# EAGLE board io3 (EAGLE 7.2.0)
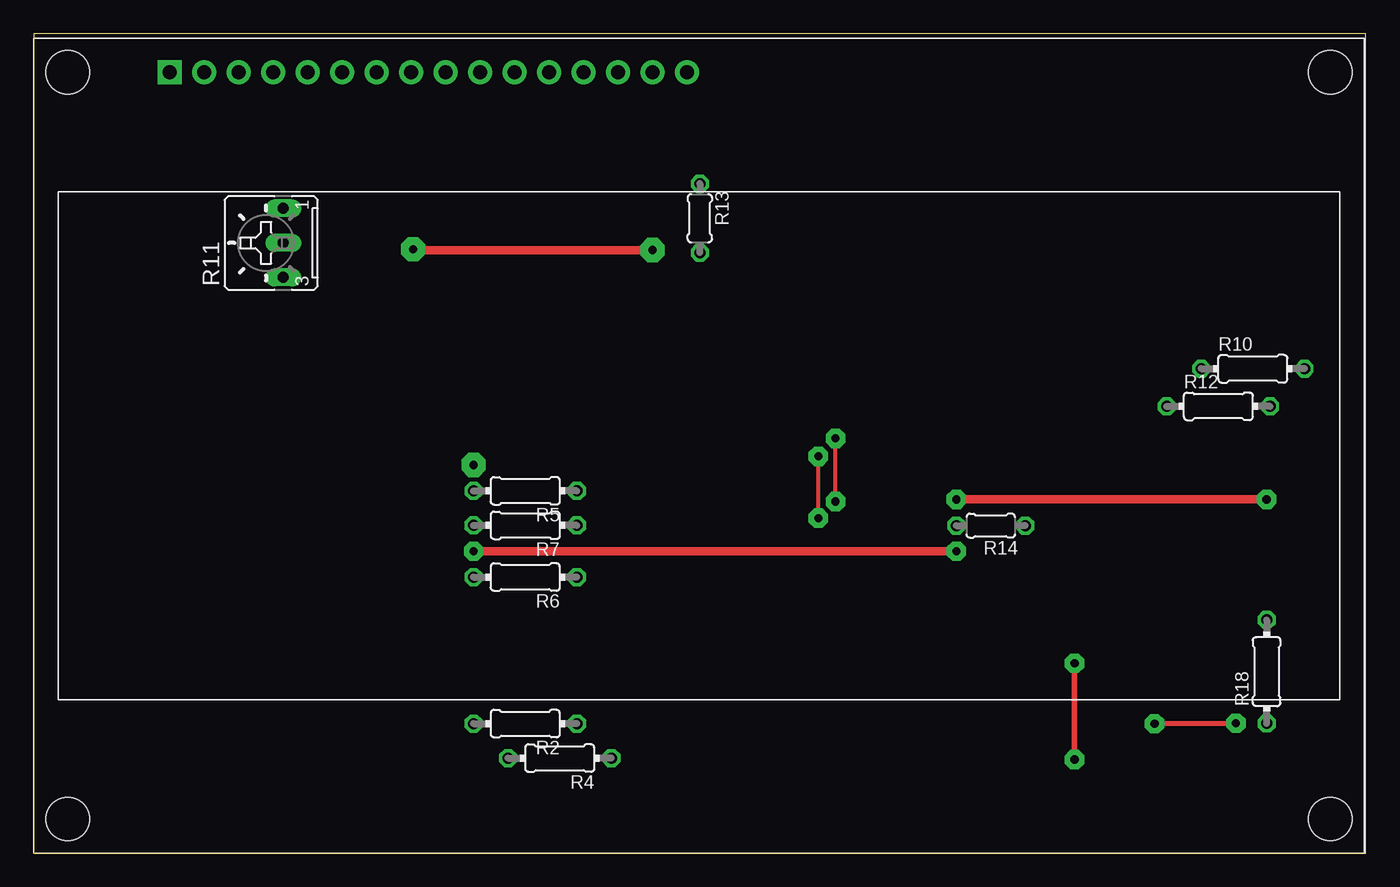
[diagram p0: board, top side]
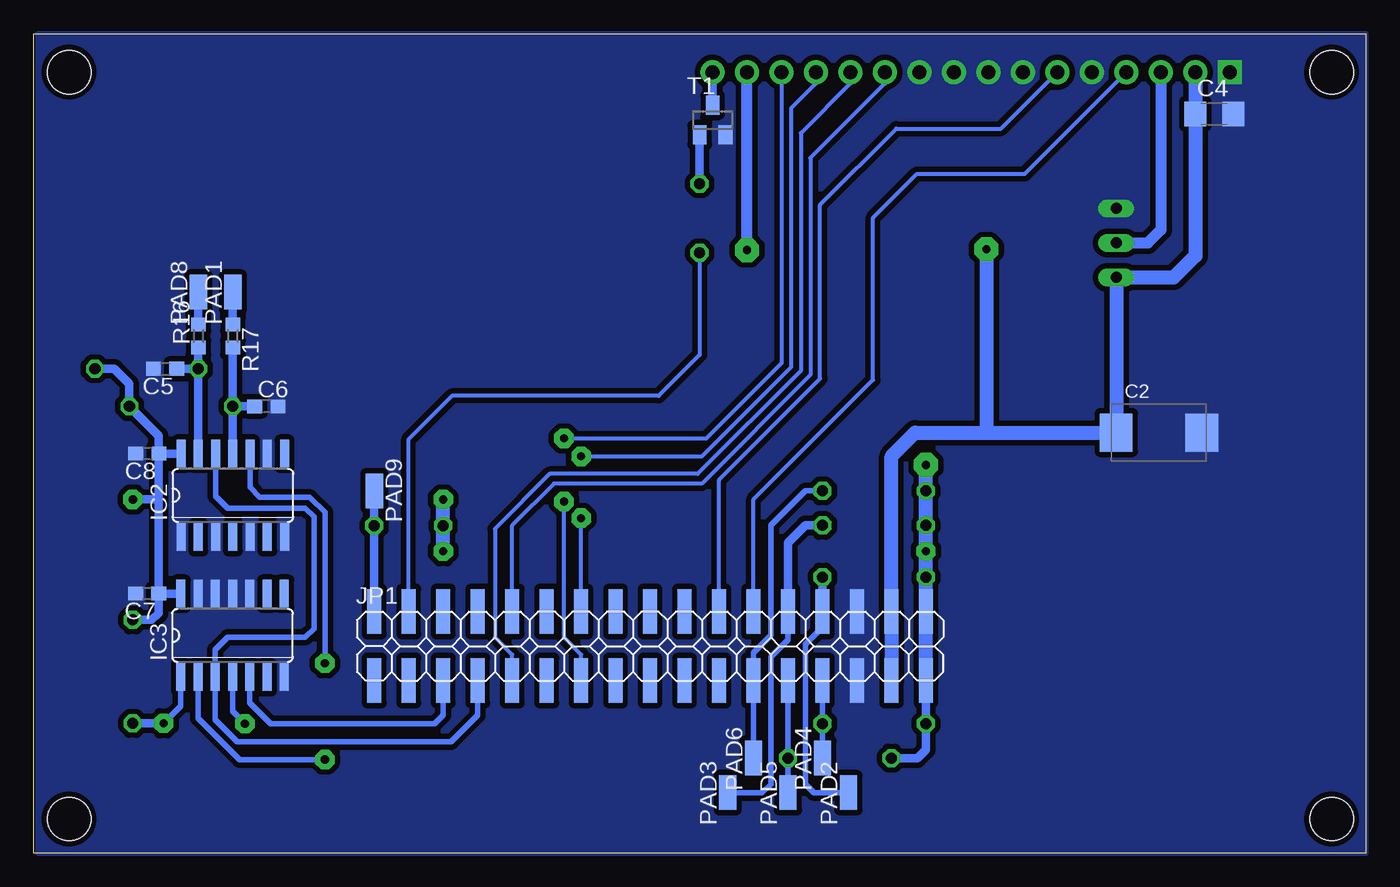
[diagram p1: board, bottom side, seen from below]

Size 98.09 x 60.31 mm. Coordinates in mm from the lower left corner, seen from the top.
Outline: 0,0 98.09,0 98.09,60.31 0,60.31 0,0
Copper layers (1*16): Top 0.035mm / dielectric 1.5mm / Bottom 0.035mm
Design rules "default *": minimum track width 10mil, minimum drill 24mil, track to track 8mil, track to pad 8mil, pad to pad 8mil, via to via 8mil, smd to smd 8mil, copper to edge 0mil, drill to drill 8mil, minimum pad ring 10mil, minimum via ring 8mil, stop-mask expansion 4mil, vias tented up to drill 0mil, thermal gap 10mil

## Footprints (pad centres in the part's own frame; a part is rotated, then mirrored left to right if it is on the bottom)
SMC_D = smd 2.4 x 2.8: + -3.15,0; - 3.15,0
C1206 = smd 1.6 x 1.8: 1 -1.4,0; 2 1.4,0
C0603 = smd 1.1 x 1: 1 -0.85,0; 2 0.85,0
SO14 = smd 0.66 x 2.032: 1 -3.81,-3.073; 2 -2.54,-3.073; 3 -1.27,-3.073; 4 0,-3.073; 5 1.27,-3.073; 6 2.54,-3.073; 7 3.81,-3.073; 8 3.81,3.073; 9 2.54,3.073; 10 1.27,3.073; 11 0,3.073; 12 -1.27,3.073; 13 -2.54,3.073; 14 -3.81,3.073
2X17SMD = smd 1.016 x 3.302: 1 -1.27,-3.81; 2 -1.27,1.27; 3 1.27,-3.81; 4 1.27,1.27; 5 3.81,-3.81; 6 3.81,1.27; 7 6.35,-3.81; 8 6.35,1.27; 9 8.89,-3.81; 10 8.89,1.27; 11 11.43,-3.81; 12 11.43,1.27; 13 13.97,-3.81; 14 13.97,1.27; 15 16.51,-3.81; 16 16.51,1.27; 17 19.05,-3.81; 18 19.05,1.27; 19 21.59,-3.81; 20 21.59,1.27; 21 24.13,-3.81; 22 24.13,1.27; 23 26.67,-3.81; 24 26.67,1.27; 25 29.21,-3.81; 26 29.21,1.27; 27 31.75,-3.81; 28 31.75,1.27; 29 34.29,-3.81; 30 34.29,1.27; 31 36.83,-3.81; 32 36.83,1.27; 33 39.37,-3.81; 34 39.37,1.27
SMD1,27-2,54 = smd 1.27 x 2.54: 1 0,0
0204/7 = drill 0.813 octagon: 1 -3.81,0; 2 3.81,0
B25U = drill 0.813 long: A 2.54,-0.889; E -2.54,-0.889; S 0,-0.889
0204/5 = drill 0.813 octagon: 1 -2.54,0; 2 2.54,0
R0603 = smd 1 x 1.1: 1 -0.85,0; 2 0.85,0
SOT23 = smd 1 x 1.4: 1 -0.95,-1.1; 2 0.95,-1.1; 3 0,1.1
LCD-20X4-4HOLES = drill 1.016 pad 1.778 square: P$1 10,57.5 | drill 1.016 pad 1.778: P$2 12.54,57.5; P$3 15.08,57.5; P$4 17.62,57.5; P$5 20.16,57.5; P$6 22.7,57.5; P$7 25.24,57.5; P$8 27.78,57.5; P$9 30.32,57.5; P$10 32.86,57.5; P$11 35.4,57.5; P$12 37.94,57.5; P$13 40.48,57.5; P$14 43.02,57.5; P$15 45.56,57.5; P$16 48.1,57.5 | hole 3.2: 2.5,2.5; 2.5,57.5; 95.5,57.5; 95.5,2.5

## Placement (x,y rotation side)
C2  [SMC_D]  15.21,30.95 0 bottom
C4  [C1206]  11.14,54.43 0 bottom
C5  [C0603]  88.44,35.66 180 bottom
C6  [C0603]  80.98,32.89 0 bottom
C7  [C0603]  89.76,19.1 180 bottom
C8  [C0603]  89.74,29.41 180 bottom
IC2  74HC14D  [SO14]  83.44,26.34 0 bottom
IC3  74HC74D  [SO14]  83.46,16.03 0 bottom
JP1  [2X17SMD]  71.75,16.51 0 bottom
PAD1  [SMD1,27-2,54]  83.44,41.3 0 bottom
PAD2  [SMD1,27-2,54]  38.1,4.45 0 bottom
PAD3  [SMD1,27-2,54]  46.99,4.45 0 bottom
PAD4  [SMD1,27-2,54]  40.01,6.99 0 bottom
PAD5  [SMD1,27-2,54]  42.55,4.45 0 bottom
PAD6  [SMD1,27-2,54]  45.09,6.99 0 bottom
PAD8  [SMD1,27-2,54]  85.98,41.3 0 bottom
PAD9  [SMD1,27-2,54]  73.03,26.67 180 bottom
R2  [0204/7]  36.2,9.53 180 top
R4  [0204/7]  38.73,6.99 180 top
R5  [0204/7]  36.2,26.67 180 top
R6  [0204/7]  36.2,20.32 180 top
R7  [0204/7]  36.2,24.13 180 top
R10  [0204/7]  89.79,35.66 0 top
R11  [B25U]  17.48,44.92 90 top
R12  [0204/7]  87.25,32.89 0 top
R13  [0204/5]  49.05,46.74 270 top
R14  [0204/5]  70.48,24.1 180 top
R16  [R0603]  85.98,38.07 90 bottom
R17  [R0603]  83.44,38.07 270 bottom
R18  [0204/7]  90.81,13.36 90 top
T1  BC847  [SOT23]  48.1,53.98 0 bottom
U$1  LCD-HD447804-HOLES20X4-4HOLES  [LCD-20X4-4HOLES]  0,0 0 top

## Library data of the parts
C2 C4-C8 R2 R4-R7 R10 R12-R14 R16-R18 = rcl
IC2 IC3 = 74xx-eu
JP1 = pinhead-2
PAD1-PAD6 PAD8 PAD9 = wirepad
R11 = pot
T1 = transistor
U$1 = HD44780LCD

## Nets
3V: C7.1 C8.1 IC2.14 IC3.14 JP1.33 JP1.34 R2.2 R4.2 R5.2 R6.2 R7.2 R10.2 R12.2 R14.2 R18.2
5V: C2.+ C4.1 JP1.31 JP1.32 R11.E U$1.P$2 U$1.P$15
BACKLIGHT_RC15: JP1.4 R13.2
D4_RD2: JP1.10 U$1.P$11
D5_RD3: JP1.9 U$1.P$12
D6_RD4: JP1.14 U$1.P$13
D7_RD5: JP1.13 U$1.P$14
GND: C2.- C4.2 C5.2 C6.2 C7.2 C8.2 IC2.1 IC2.3 IC2.5 IC2.7 IC2.9 IC3.7 IC3.10 IC3.11 IC3.12 IC3.13 JP1.29 JP1.30 R11.A T1.2 U$1.P$1 U$1.P$5 U$1.P$7 U$1.P$8 U$1.P$9 U$1.P$10
LCD_EN_RE1: JP1.22 U$1.P$6
N$1: T1.3 U$1.P$16
N$2: IC3.1 IC3.4 R18.1
N$5: PAD8.1 R16.2
N$6: R13.1 T1.1
N$7: PAD1.1 R17.1
N$14: R11.S U$1.P$3
RF8: JP1.1
ROT_A_DT: C5.1 IC2.13 R10.1 R16.1
ROT_B_: IC2.10 IC3.2
ROT_B_CLK: C6.1 IC2.11 R12.1 R17.2
ROT_DIR: IC3.5 JP1.5
ROT_STEP: IC2.12 IC3.3 JP1.7
ROT_SW: JP1.2 PAD9.1 R14.1
RS_RG12: JP1.24 U$1.P$4
RW_RG14: JP1.21
S1: JP1.27 PAD4.1 R2.1
S2: JP1.28 PAD2.1 R6.1
S3: JP1.25 PAD5.1 R4.1
S4: JP1.26 PAD3.1 R7.1
S5: JP1.23 PAD6.1 R5.1
SCL1: JP1.3
SDA1: JP1.6

## Tracks (layer width: path | path; a pad name or v marks a point on that pad's centre or on a via)
3V  (via drill 0.6 pad 1.42, 0.6 pad 1.78)
  Top 0.61: v32.38,22.23 v67.94,22.23 | v90.81,26.04 v67.94,26.04
  Bottom 0.61: JP1.33 R2.2 32.38,7.62 33.02,6.99 R4.2 | IC3.14 C7.1 | C7.1 88.91,26.04 | 88.91,26.04 88.91,29.39 C8.1 | C8.1 IC2.14 | C8.1 88.89,30.72 R12.2 91.06,34.54 92.18,35.66 R10.2 | C7.1 88.91,17.66 89.41,17.17 R18.2 | v90.81,26.04 88.91,26.04
  Bottom 1.016: JP1.33 JP1.34 R6.2 v32.38,22.23 R7.2 R5.2 v32.38,28.57 | v67.94,22.23 R14.2 v67.94,26.04
5V  (via drill 0.6 pad 1.78)
  Top 0.61: v45.56,44.4 27.99,44.4 v27.94,44.45
  Bottom 0.813: v45.56,44.4 U$1.P$15
  Bottom 1.016: JP1.31 JP1.32 34.92,29.21 33.18,30.95 27.94,30.95 | U$1.P$2 C4.1 12.54,43.98 14.13,42.38 R11.E C2.+ 27.94,30.95 | v27.94,44.45 27.94,30.95
BACKLIGHT_RC15
  Bottom 0.305: JP1.4 70.48,30.48 67.31,33.66 52.07,33.66 49.05,36.67 R13.2
D4_RD2
  Bottom 0.305: JP1.10 62.87,24.13 59.79,27.2 48.9,27.2 40.89,35.2 40.89,51.18 35.4,56.67 U$1.P$11
D5_RD3
  Bottom 0.305: JP1.9 62.87,14.61 64.14,15.88 64.14,23.88 60.1,27.91 49.2,27.91 41.6,35.51 41.6,53.01 37.94,56.67 U$1.P$12
D6_RD4  (via drill 0.6 pad 1.42)
  Top 0.305: v57.78,24.66 v57.78,29.21
  Bottom 0.305: JP1.14 v57.78,24.66 | v57.78,29.21 48.9,29.21 42.32,35.79 42.32,54.84 40.48,56.67 U$1.P$13
D7_RD5  (via drill 0.6 pad 1.42)
  Top 0.305: v59.05,25.88 v59.05,30.53
  Bottom 0.305: JP1.13 57.78,14.61 59.05,15.88 v59.05,25.88 | v59.05,30.53 48.56,30.53 43.02,36.08 U$1.P$14
GND
  pour Bottom (isolate 0.406, no thermals): 0,60.33 0,0 97.79,0 97.79,60.33
LCD_EN_RE1
  Bottom 0.305: U$1.P$6 26.86,53.34 34.57,53.34 40.18,47.73 40.18,34.92 47.62,27.48 JP1.22
N$1
  Bottom 0.61: T1.3 U$1.P$16
N$2  (via drill 0.6 pad 1.42)
  Top 0.406: v82.55,9.53 v88.54,9.55
  Bottom 0.406: IC3.4 83.46,10.44 v82.55,9.53 | IC3.1 87.27,10.82 v88.54,9.55
  Bottom 0.61: v88.54,9.55 R18.1
N$5
  Bottom 0.61: R16.2 PAD8.1
N$6
  Bottom 0.61: R13.1 T1.1
N$7
  Bottom 0.61: R17.1 PAD1.1
N$14
  Bottom 0.813: U$1.P$3 15.08,45.88 16.04,44.92 R11.S
RF8
  Bottom 0.305: JP1.1 73.03,13.84
ROT_A_DT
  Bottom 0.61: IC2.13 R10.1 | R10.1 C5.1 | R10.1 R16.1
ROT_B_  (via drill 0.6 pad 1.42)
  Top 0.406: v76.66,6.88 v76.66,13.97
  Bottom 0.406: IC2.10 82.17,26.92 81.46,26.21 77.78,26.21 76.66,25.09 v76.66,13.97 | v76.66,6.88 82.96,6.88 86,9.93 IC3.2
ROT_B_CLK
  Bottom 0.61: IC2.11 R12.1 | C6.1 R12.1 | R12.1 R17.2
ROT_DIR
  Bottom 0.406: JP1.5 67.94,10.16 68.58,9.53 80.64,9.53 82.19,11.07 IC3.5
ROT_STEP
  Bottom 0.406: IC2.12 84.71,26.29 83.82,25.4 78.11,25.4 77.47,24.77 77.47,16.51 78.11,15.88 83.82,15.88 84.73,14.96 IC3.3 84.73,9.8 83.13,8.2 67.36,8.2 65.41,10.16 JP1.7
ROT_SW
  Bottom 0.61: PAD9.1 R14.1 JP1.2
RS_RG12
  Bottom 0.305: JP1.24 45.09,26.04 36.28,34.84 36.28,46.78 33.05,50.01 25.11,50.01 U$1.P$4
S1
  Bottom 0.406: JP1.27 R2.1 PAD4.1
S2
  Bottom 0.406: JP1.28 40.01,16.64 41.27,15.37 41.27,5.08 40.64,4.45 PAD2.1
  Bottom 0.61: JP1.28 R6.1
S3
  Bottom 0.406: PAD5.1 R4.1 JP1.25
S4
  Bottom 0.406: JP1.26 42.55,15.72 43.81,14.45 43.81,5.08 44.45,4.45 PAD3.1
  Bottom 0.61: JP1.26 42.55,22.86 41.27,24.13 R7.1
S5
  Bottom 0.406: PAD6.1 JP1.23 45.09,14.76 43.81,16.03 43.81,24.13 41.27,26.67 R5.1